# Altium PCB PCB_ActiveFilters.PcbDoc
Units mil, origin at the board's own origin, x right, y up, seen from the top; angles counter-clockwise.
Board outline 2760 x 1510 mil, 2 copper layers (Top Layer, Bottom Layer); 16 components, 13 nets, 48 pads, 1 vias.
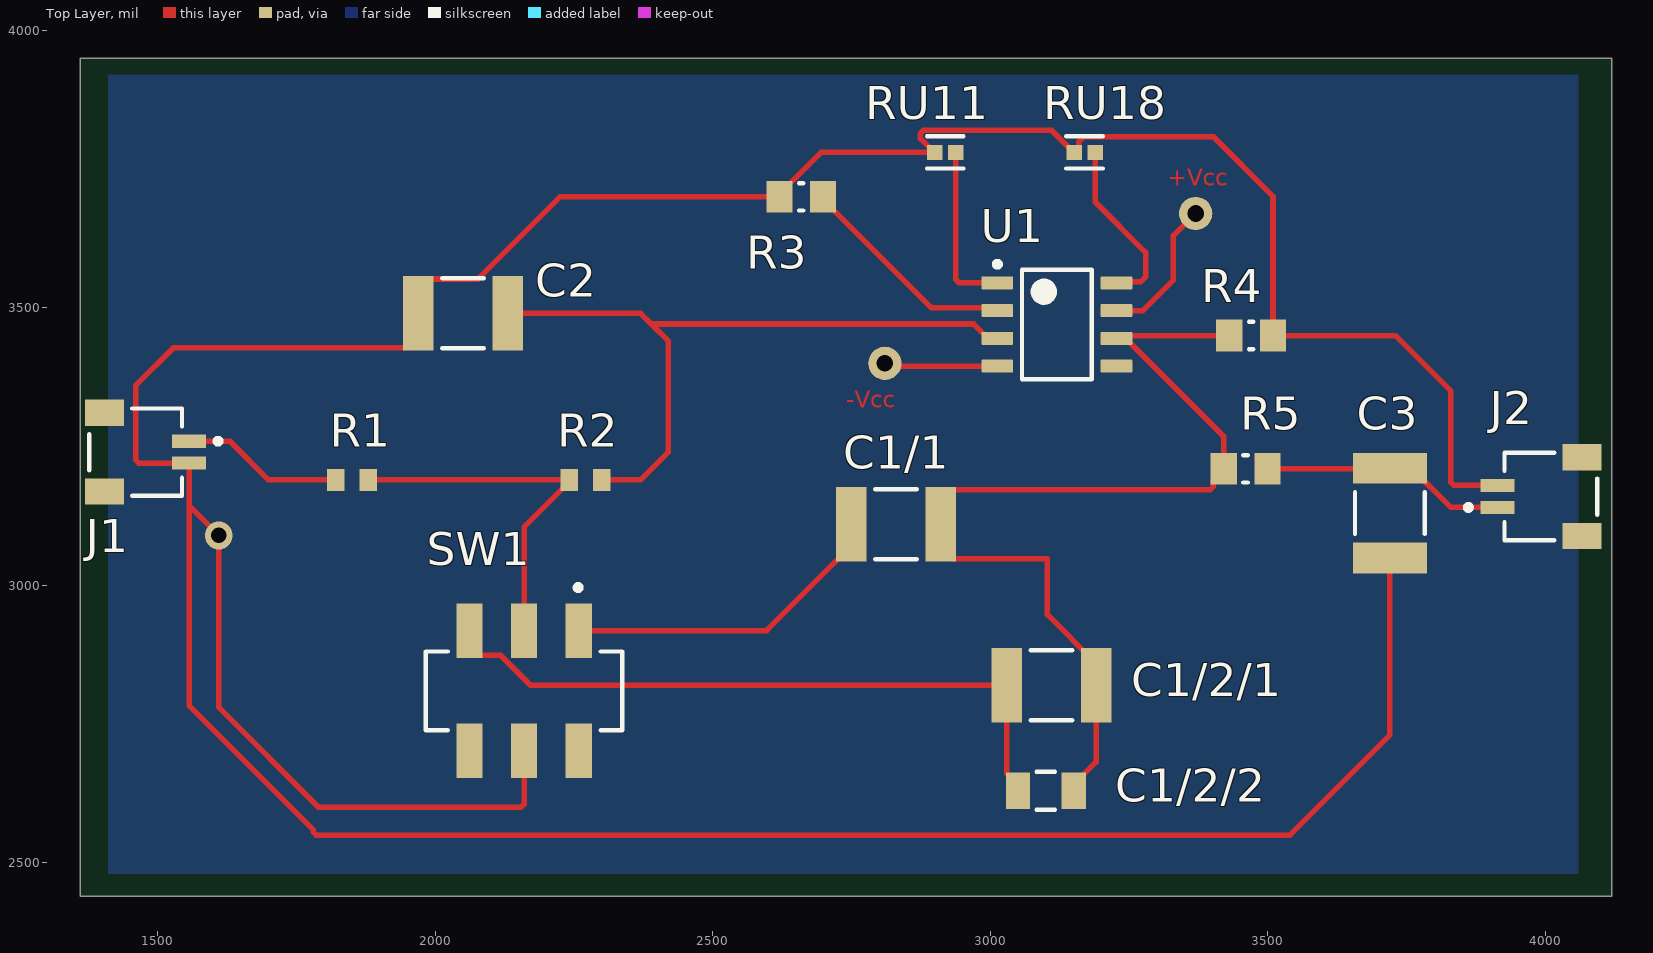
[diagram p0: Top Layer view]
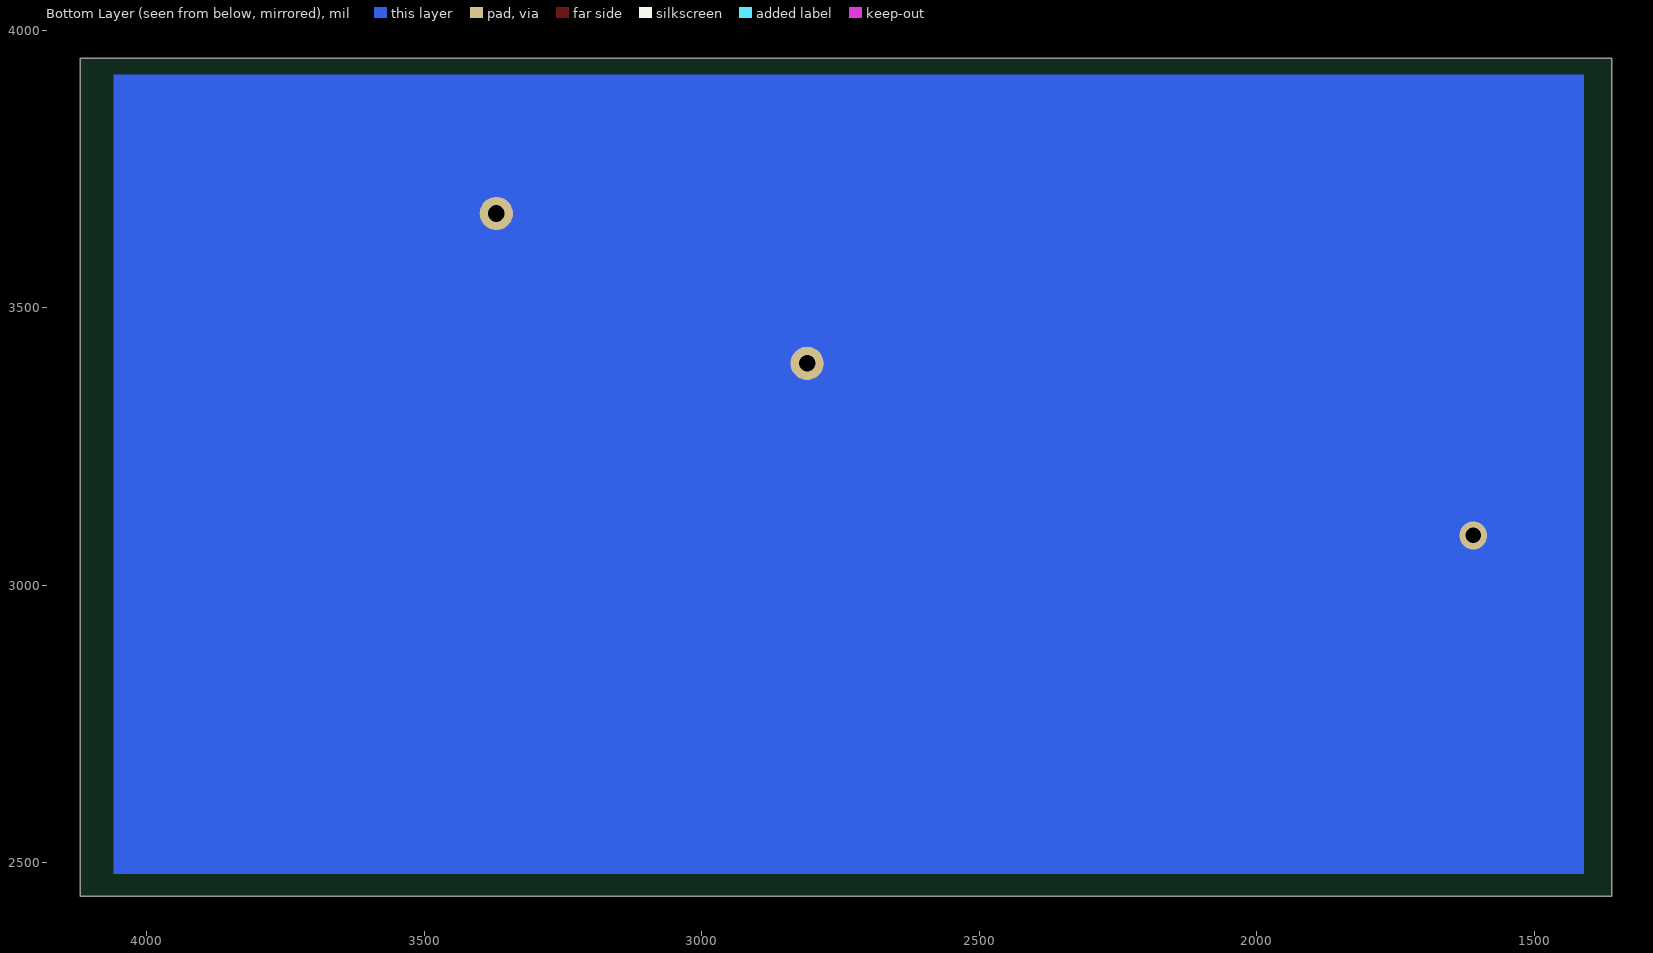
[diagram p1: Bottom Layer view, seen from below]
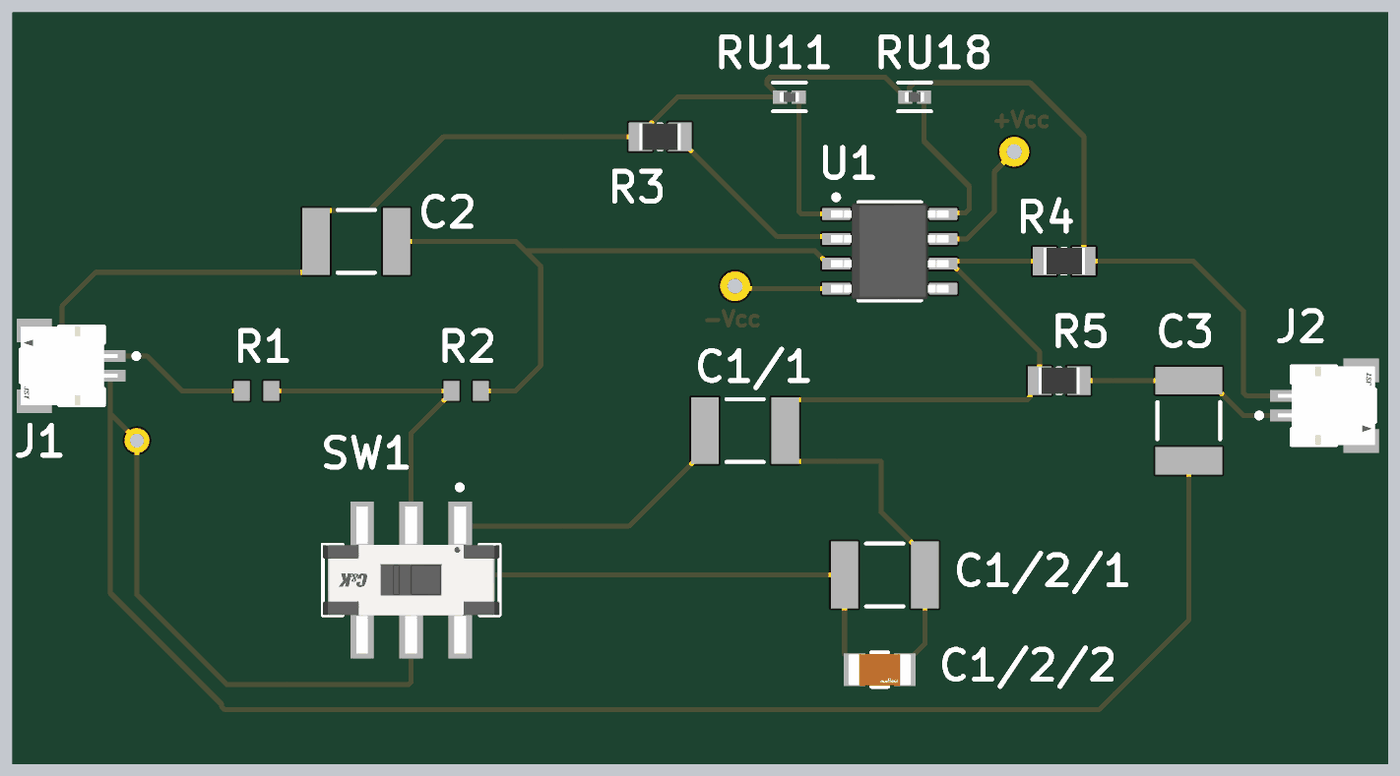
[diagram p2: 3D render of the assembled board from above, using the file's embedded part models]

## Layer stack, top to bottom
Top Solder: solder mask 0.4, Solder Resist, Dk 3.5
Top Layer: signal copper 1.4
Dielectric 1: dielectric 12.6, FR-4, Dk 4.8
Bottom Layer: signal copper 1.4
Bottom Solder: solder mask 0.4, Solder Resist, Dk 3.5

## Board outline
1360,2440 4120,2440 4120,3950 1360,3950

## Design rules (kind name [scope] priority, off if disabled: settings)
Clearance [All] p1: gap=5 ignorepadtopadclearanceinfootprint=FALSE
ComponentClearance [All] p1: gap=10 collisioncheckmode=3 verticalgap=5 showdistances=FALSE
DiffPairsRouting [All] p1: maxlimit=10 minlimit=5 mostfreqgap=10 toplayer_minwidth=15 toplayer_maxwidth=15 toplayer_prefwidth=15 bottomlayer_minwidth=15 bottomlayer_maxwidth=15 bottomlayer_prefwidth=15 maxuncoupledlength=500
HoleToHoleClearance [All] p1: gap=5 allowstackedmicrovias=TRUE
MinimumSolderMaskSliver [All] p1: minsoldermaskwidth=5
PlaneConnect [All] p1: planeconnectstyle=Relief reliefexpansion=20 reliefentries=4 reliefconductorwidth=5 reliefairgap=10
PolygonConnect [All] p1: connectstyle=Relief reliefconductorwidth=10 reliefentries=4 polygonreliefangle="90 Angle" airgapwidth=10
RoutingVias [All] p1: holewidth=28 width=50 viastyle="Through Hole" minholewidth=28 minwidth=50 maxholewidth=28 maxwidth=50
ShortCircuit [All] p1: allowed=TRUE
SilkToSilkClearance [All] p1: silktosilkclearance=5
SilkToSolderMaskClearance [IsPad] p1: minsilkscreentomaskgap=5 clearancetoexposedcopper=TRUE
SolderMaskExpansion [All] p1: expansion=4 istentingtop=FALSE
SupplyNets "Schematic Supply Nets" [InNet('GND')] p1: voltage=0.000
Width [All] p1: maxlimit=10 minlimit=5 preferedwidth=10
22 further rules are at their usual default settings.

## Components (designator, comment, footprint, x,y, rotation, side; value= is the part's Value field where it differs from the comment)
C1/1 "CAP 150nF 100V 1812(4532)" CAPC1812(4532)230_N 2830,3110 r180 top value=150nF
C1/2/1 "CAP 150nF 100V 1812(4532)" CAPC1812(4532)230_N 3110,2820 r180 top value=150nF
C1/2/2 "GRM3195C1H203JA01D" FP-GRM319-0_15-IPC_C 3100,2630 r0 top
C2 "CAP 150nF 100V 1812(4532)" CAPC1812(4532)230_N 2050,3490 r0 top value=150nF
C3 "CAP 150nF 100V 1812(4532)" CAPC1812(4532)230_N 3720,3130 r90 top value=150nF
J1 "SM02B-SRSS-TB (LF)(SN)" FP-SM02B-SRSS-TB_LF_SN-MFG 1460,3240 r270 top
J2 "SM02B-SRSS-TB (LF)(SN)" FP-SM02B-SRSS-TB_LF_SN-MFG 4010,3160 r90 top
R1 "RC0603JR-0710KL" RESC1608X55X25ML10T15 1850,3190 r0 top
R2 "RC0603JR-0710KL" RESC1608X55X25ML10T15 2270.47,3190 r0 top
R3 "RC0805FR-071KL" RESC2013X60X35ML10T20 2659.37,3700 r0 top
R4 "RC0805FR-071KL" RESC2013X60X35ML10T20 3470,3450 r180 top
R5 "RC0805FR-071KL" RESC2013X60X35ML10T20 3460,3210 r0 top
RU11 "RC0402JR-07100KL" FP-RC0402-0_4-IPC_A 2918.84,3780 r0 top
RU18 "RC0402JR-07100KL" FP-RC0402-0_4-IPC_A 3170,3780 r0 top
SW1 "JS202011SCQN" FP-JS202011SCQN-MFG 2160,2810 r180 top (schematic designator SW?)
U1 "OPA277UA" D0008A_N 3120,3470 r0 top

## Footprints (in the part's own frame and the unit in brackets; to place one, negate y for a bottom-side part, rotate by r counter-clockwise, add the part's x,y. Pads: shape width x height; smd on the part's side, far side on the other; paste and mask are expansions set on the pad)
CAPC1812(4532)230_N [mm] "Chip Capacitor, Body 4.5x3.2mm, Height 2.3mm, IPC Medium Density"
  rect 1.4x3.4 smd: 1(-2.05,0) 2(2.05,0)
  silkscreen extent -0.95,-1.6 0.95,1.6, body extent -2.4,-1.7 2.4,1.7, height 2.3
D0008A_N [mm] "SOIC, 8-Leads, Body 5x4mm, Pitch 1.27mm, IPC Medium Density"
  rrect17% 1.45x0.6 smd: 1(-2.725,1.905) 2(-2.725,0.635) 3(-2.725,-0.635) 4(-2.725,-1.905) 5(2.725,-1.905) 6(2.725,-0.635) 7(2.725,0.635) 8(2.725,1.905)
  silkscreen extent -2.85,-2.5 1.6,2.88, body extent -3,-2.45 3,2.45, height 1.63
FP-GRM319-0_15-IPC_C [mil]
  rect 43.53x65.28 smd paste+0 mask+0: 1(-50.25,0) 2(50.25,0)
  silkscreen extent -17,-34 17,34, body extent -76,-38 76,38, height 10
FP-JS202011SCQN-MFG [mm]
  rect 1.2x2.5 smd paste+0 mask+0: 1(-2.5,-2.75) 2(0,-2.75) 3(2.5,-2.75) 4(-2.5,2.75) 5(0,2.75) 6(2.5,2.75)
  silkscreen extent -4.5,-4.85 4.5,1.8, body extent -4.6,-4.1 4.6,4.1, height 0.25
FP-RC0402-0_4-IPC_A [mil]
  rect 28.16x26.48 smd paste+0 mask+0: 1(-18.84,0) 2(18.84,0)
  silkscreen extent -33,-29 33,29, body extent -41,-21 41,21, height 10
FP-SM02B-SRSS-TB_LF_SN-MFG [mm]
  rect 0.6x1.55 smd paste+0 mask+0: 1(-0.5,2.45) 2(0.5,2.45)
  rect 1.2x1.8 smd paste+0 mask+0: 3(-1.8,-1.425) 4(1.8,-1.425)
  silkscreen extent -2,-2.12 2,3.9, body extent -2.5,-2.42 2.5,3.32, height 0.25
RESC1608X55X25ML10T15 [mm] "Chip Resistor, 2-Leads, Body 1.60x0.80mm, IPC Low Density"
  rect 0.8x1 smd: 1(-0.75,0) 2(0.75,0)
  body extent -0.85,-0.45 0.85,0.45, height 0.55
RESC2013X60X35ML10T20 [mm] "Chip Resistor, 2-Leads, Body 2.1x1.35mm, IPC Low Density"
  rect 1.2x1.45 smd: 1(-1,0) 2(1,0)
  silkscreen extent -0.1,-0.63 0.1,0.63, body extent -1.05,-0.68 1.05,0.67, height 0.6

## Part data
C1/1 C1/2/1 C2 C3: library part CMP-1040-01383-1, "CAP 150nF 100V ±5% 1812 (4532 Metric) Thickness 2.3mm SMD", Case-EIA=1812, Case-Metric=4532, Rated Voltage="100 V", Tolerance=Â±5%, Max Thickness="2.3 mm", Technology=SMT
C1/2/2: library part CMP-06035-011753-1, "Chip Multilayer Ceramic Capacitors for General Purpose, 1206, 20000pF, C0G, 30ppm/°C, 5%, 50V", Capacitance=20nF, Case Code (Imperial)=1206, Case Code (Metric)=3216, Dielectric=C0G, Max Operating Temperature=125°C, Min Operating Temperature=-55°C, Package Quantity=1, Temperature Coefficient=30ppm/°C, Tolerance=5%, Voltage=50V, Case/Package=1206, Depth=1.6mm, Height=0.85mm, Lead Free="Lead Free", Length=3.2mm, Mount="Surface Mount", Packaging="Tape and Reel", Radiation Hardening=No, Termination=SMD/SMT, Thickness=0.037inch, Voltage Rating=50V, Voltage Rating (DC)=50V, Width=0.063inch
J1 J2: library part CMP-17439-000368-1, "CONN HEADER SMD R/A 2POS 1MM", Color=Natural, Contact Resistance=40mR, Current Rating=700mA, Flammability Rating="UL94 V-0", Housing Color=Beige, Insulation Resistance=100MR, Max Current Rating=1A, Max Operating Temperature=85°C, Max Voltage Rating (AC)=50V, Min Operating Temperature=-25°C, Connector Type=Header, Contact Finish - Mating=TIN, Contact Material="Copper Alloy", Contact Plating=Tin, Contact Shape=Square, Contact Type="Male Pin", Depth=4.95mm, Fastening Type=Pull, Housing Material=Polyamide, Insulation Color=Natural, Insulation Material=Nylon, Lead Free="Lead Free", Lead Pitch=1mm, Length=4mm, Material=Polyamide, Mount="Surface Mount", Number Of Contacts=2, Number of Positions=2, Number of Rows=1, Orientation="Right Angle", Packaging="Tape and Reel", Pitch=1mm, REACH SVHC="No SVHC", Series=SR, Termination=Solder, Voltage Rating=50V, Voltage Rating (AC)=50V
R1 R2: library part CMP-2000-05022-1, "Resistor, 10 KOhm, +/- 5%, 100 mW, -55 to 155 degC, 0603 (1608 Metric), RoHS, Tape and Reel", Case Code - in=0603, Case Code - mm=1608, Manufacturer=Yageo, Operating Temperature Range=-55Cto+155C, Package Description="2-Pin Surface Mount Device, Body 1.6 x 0.8 mm", Package Reference=603, Power Rating=100mW, Resistance=10kOhms, Temperature Coefficient=100PPM/C, Tolerance=5%, Voltage Rating=50V, Datasheet URL=http://www.farnell.com/datasheets/443971.pdf, Datasheet Version="Rev. 4, 04/2009", Manufacturer URL=http://www.yageo.com/, Packaging=Reel, Product=ThickFilmResistorsGeneralPurpose, Series=RC, Termination Style=SMD/SMT
R3 R4 R5: library part CMP-2100-03671-1, "Chip Resistor, 1 KOhm, +/- 1%, 125 mW, -55 to 155 degC, 0805 (2012 Metric), RoHS, Tape and Reel", Case Code (Imperial)=0805, Case Code (Metric)=2012, Manufacturer=Yageo, Max Operating Temperature=155degC, Max Power Dissipation=125mW, Min Operating Temperature=-55degC, Package Description="2-Pin Surface Mounted Device, Body 2 x 1.25 mm", Package Quantity=1, Resistance=1KOhm, Temperature Coefficient=100ppm/degreesC, Tolerance=1%, Voltage Rating=150V, Case/Package=0805, Composition=ThickFilm, Datasheet URL=http://www.yageo.com/NewPortal/yageodocoutput?fileName=/pdf/R-Chip/PYu-RC_Group_51_RoHS_L_5.pdf, Datasheet Version="Rev. 5, 10/2016", Depth=1.25mm, Height=0.024inch, Lead Free=LeadFree, Length=0.079inch, Manufacturer URL=http://www.yageo.com/, Military Standard=Not, Number of Pins=2, Number of Terminations=2, Package Reference=0805, Packaging=TapeandReel, Power Rating=125mW, REACH SVHC=Unknown, RoHSCompliant=true, Termination=SMD/SMT, Voltage Rating (DC)=150V, Width=0.049inch
RU11 RU18: library part CMP-2002-07913-2, "RES 100K OHM 5% 1/16W 0402", Case Code (Imperial)=0402, Case Code (Metric)=1005, Max Operating Temperature=155°C, Max Power Dissipation=63mW, Min Operating Temperature=-55°C, Package Quantity=1, Resistance=100kR, Resistance Tolerance=5%, Resistor Type="Thick Film", Temperature Coefficient=100ppm/°C, Voltage Rating=50V, Case/Package=0402, Construction=Rectangular, Depth=0.5mm, Features="Moisture Resistant", Height=0.016inch, Lead Free="Lead Free", Length=1mm, Military Standard=Not, Number of Terminations=2, Packaging="Tape and Reel", Power Rating=63mW, RoHS Compliant=Yes, Series=RC, Size Code=0402, Termination=SMD/SMT, Tolerance=5%, Width=0.02inch
SW1: library part CMP-2000-05087-3, "SWITCH SLIDE DPDT 300MA 6V", Actuator Color=Black, Contact Current Rating=300mA, Contact Resistance=70mR, Flammability Rating="UL94 V-2", Max Operating Temperature=85°C, Max Voltage Rating (DC)=6V, Min Operating Temperature=-20°C, Package Quantity=1, Actuator Length=2mm, Actuator Material=Nylon, Actuator Type=Standard, Contact Material="Copper Alloy", Contact Plating=Silver, Current Rating=300mA, Depth=7.5mm, Electrical Life=5000Cycles, Housing Material=Nylon, Lead Free="Lead Free", Length=9mm, Max Current Rating=300mA, Mount="Surface Mount", Orientation=Vertical, Packaging="Tape and Reel", Radiation Hardening=No, REACH SVHC="No SVHC", Series=JS, Switch Function=On-On, Switch Travel=2mm, Termination="Gull Wing", Throw Configuration=DPDT, Voltage Rating (DC)=6V
U1: library part CMP-0272-00373-3, "High Precision Operational Amplifier, 4 to 36 V, -40 to 85 degC, 8-pin SOIC (D8), Green (RoHS & no Sb/Br)", Manufacturer="Texas Instruments", Rating=Catalog, Total Supply Voltage(Max)(+5V is 5, +/-5V is 10)=36, Total Supply Voltage(Min)(+5V is 5, +/-5V is 10)=4, CMRR(Min)(dB)=115, Code_JEDEC=MS-012, ComponentLink1Description="Manufacturer URL", ComponentLink1URL=http://www.ti.com/, ComponentLink2Description=Datasheet, ComponentLink2URL=http://www.ti.com/lit/ds/symlink/opa277.pdf, ComponentLink3Description="Package Specification", ComponentLink3URL=http://www.ti.com/litv/pdf/msoi002j, DatasheetVersion=SBOS079A, Eco-Plan="Green (RoHS & no Sb/Br)", GBW(Typ)(MHz)=1, IIB(Max)(pA)=2800, Iq per channel(Max)(mA)=0.825, Mounting Technology="Surface Mount", Number of Channels=1, Offset Drift(Typ)(uV/C)=0.15, PackageDescription="8-Pin Plastic Small Outline, Body 4.9 x 3.9 mm, Pitch 1.27 mm", PackageReference=D0008A, PackageVersion="4040047-3/M, 06/2011", Packing=TUBE, PartNumber=OPA277UA, Slew Rate(Typ)(V/us)=0.8, Sub Family="High Supply Voltage Amplifier (>=30V), Low Noise Amp (<=10nV/rtHz), Low Offset Voltage Amplifier (<=500uV), Precision Amplifier", Vio (25C)(Max)(mV)=0.05

## Free pads (board coordinates)
  round 60 hole 30: 2(2810,3400) 3(3370,3670)

## Via types
v1: diameter 50, hole 28, Top Layer to Bottom Layer, 1 vias

## Nets (pads, with @x,y where several pads share a name; then routed paths per layer and width w, separated by ;. In a path a pad name is that pad's centre, name@x,y a point inside that pad or via, vN(x,y) a via of type N, cw(c..) or ccw(c..) an arc to the next point about the centre after c; other vN are vias at no path point)
+Vcc: pad.3 U1.7 | length 247.9
  Top Layer w10: U1.7 3275,3495 3330,3550 3330,3630 pad.3@3360,3660
-Vcc: pad.2 U1.4 | length 187.7
  Top Layer w10: pad.2@2825,3395 U1.4
BTW: C1/1.1 C1/2/1.1 C1/2/2.2 R4.2 R5.1 U1.6 | length 1824.7
  Top Layer w10: C1/2/2.2 3150.25,2640.88 3190.71,2681.34 C1/2/1.1 3190.71,2859.37 3102.72,2947.36 3102.72,3048.07 2933.27,3048.07 2910.71,3070.63 C1/1.1 2910.71,3149.37 2933.27,3171.93 3396.15,3171.93 3402.01,3177.79 3402.01,3191.38 R5.1 3420.63,3268.39 3244.02,3445 U1.6 3232.28,3450 R4.2
GND: C2.1 C3.1 J1.2 J2.2 R3.1 R4.1 RU11.1 RU18.1 SW1.5 | length 7722.1
  Top Layer w10: SW1.5 2160,2605.86 2154.14,2600 1790,2600 1610,2780 v1(1610,3090) 1556.46,3143.54 ; RU11.1 RU11.1@2899.16,3780 ; C3.1 3720,2730 3540,2550 1785.86,2550 1780,2555.86 1780,2560 1556.46,2783.54 1556.46,3143.54 ; J2.2 3913.23,3180 3835.86,3180 3830,3185.86 3830,3350 3730,3450 R4.1 3509.37,3700.63 3401.76,3808.24 3168.55,3808.24 3159.76,3799.45 3159.76,3788.24 3151.52,3780 RU18.1 3150.32,3780 3110.32,3820 2880,3820 2874.14,3814.14 2874.14,3805.01 RU11.1@2899.16,3780 ; 1556.46,3143.54 J1.2 1465.86,3220.32 1460,3226.17 1460,3360 1528.07,3428.07 1946.73,3428.07 1969.29,3450.63 C2.1 1969.29,3529.37 1991.85,3551.93 2076.94,3551.93 2225.01,3700 R3.1 2620,3704.92 2695.08,3780 RU11.1@2899.16,3780
NetC1/1_2: C1/1.2 SW1.1 | length 593.3
  Top Layer w10: SW1.1 2596.93,2918.27 2749.29,3070.63 C1/1.2
NetC1/2/1_2: C1/2/1.2 C1/2/2.1 SW1.3 | length 1221.9
  Top Layer w10: SW1.3 2061.57,2892.68 2080.2,2874.06 2117.24,2874.06 2171.29,2820 C1/2/1.2 3029.29,2661.34 3049.75,2640.88 C1/2/2.1
NetC2_2: C2.2 R2.2 U1.3 | length 1285.1
  Top Layer w10: C2.2 2370,3490 2389.09,3470.91 ; R2.2 2370,3190 2420,3240 2420,3440 2389.09,3470.91 ; U1.3 2995.98,3445 2970.08,3470.91 2389.09,3470.91
NetR1_2: R1.2 R2.1 SW1.2 | length 666.7
  Top Layer w10: R1.2 R2.1 2240.94,3186.06 2160,3105.12 SW1.2
NetR3_2: R3.2 U1.2 | length 401.8
  Top Layer w10: R3.2 2698.74,3695.08 2893.82,3500 3007.72,3500 U1.2
NetRU11_2: RU11.2 U1.1 | length 306.6
  Top Layer w10: RU11.2 2937.68,3550.86 2943.54,3545 U1.1
NetRU18_2: RU18.2 U1.8 | length 335.8
  Top Layer w10: RU18.2 3188.84,3691.16 3280,3600 3280,3555.86 3270.83,3546.68 3228.97,3546.68 U1.8 U1.8@3210.55,3545
Vin: J1.1 R1.1 | length 292.9
  Top Layer w10: J1.1 1629.68,3259.68 1699.37,3190 R1.1
Vout2: C3.2 J2.1 R5.2 | length 443.6
  Top Layer w10: R5.2 3719.29,3210 C3.2 3759.37,3210.71 3829.76,3140.32 J2.1
pads on no net: J1.3 J1.4 J2.3 J2.4 SW1.4 SW1.6 U1.5

## Other copper
Top Layer:
  text "+Vcc" at 3320,3720 h30
  text "-Vcc" at 2740,3320 h30
Bottom Layer:
  rectangle net GND: 1410,2480 4060,3920